# Altium PCB Drum_Toy.PcbDoc
Units mil, origin at the board's own origin, x right, y up, seen from the top; angles counter-clockwise.
Board outline 6000 x 4000 mil, 2 copper layers (Top Layer, Bottom Layer); 32 components, 21 nets, 91 pads, 3 vias.
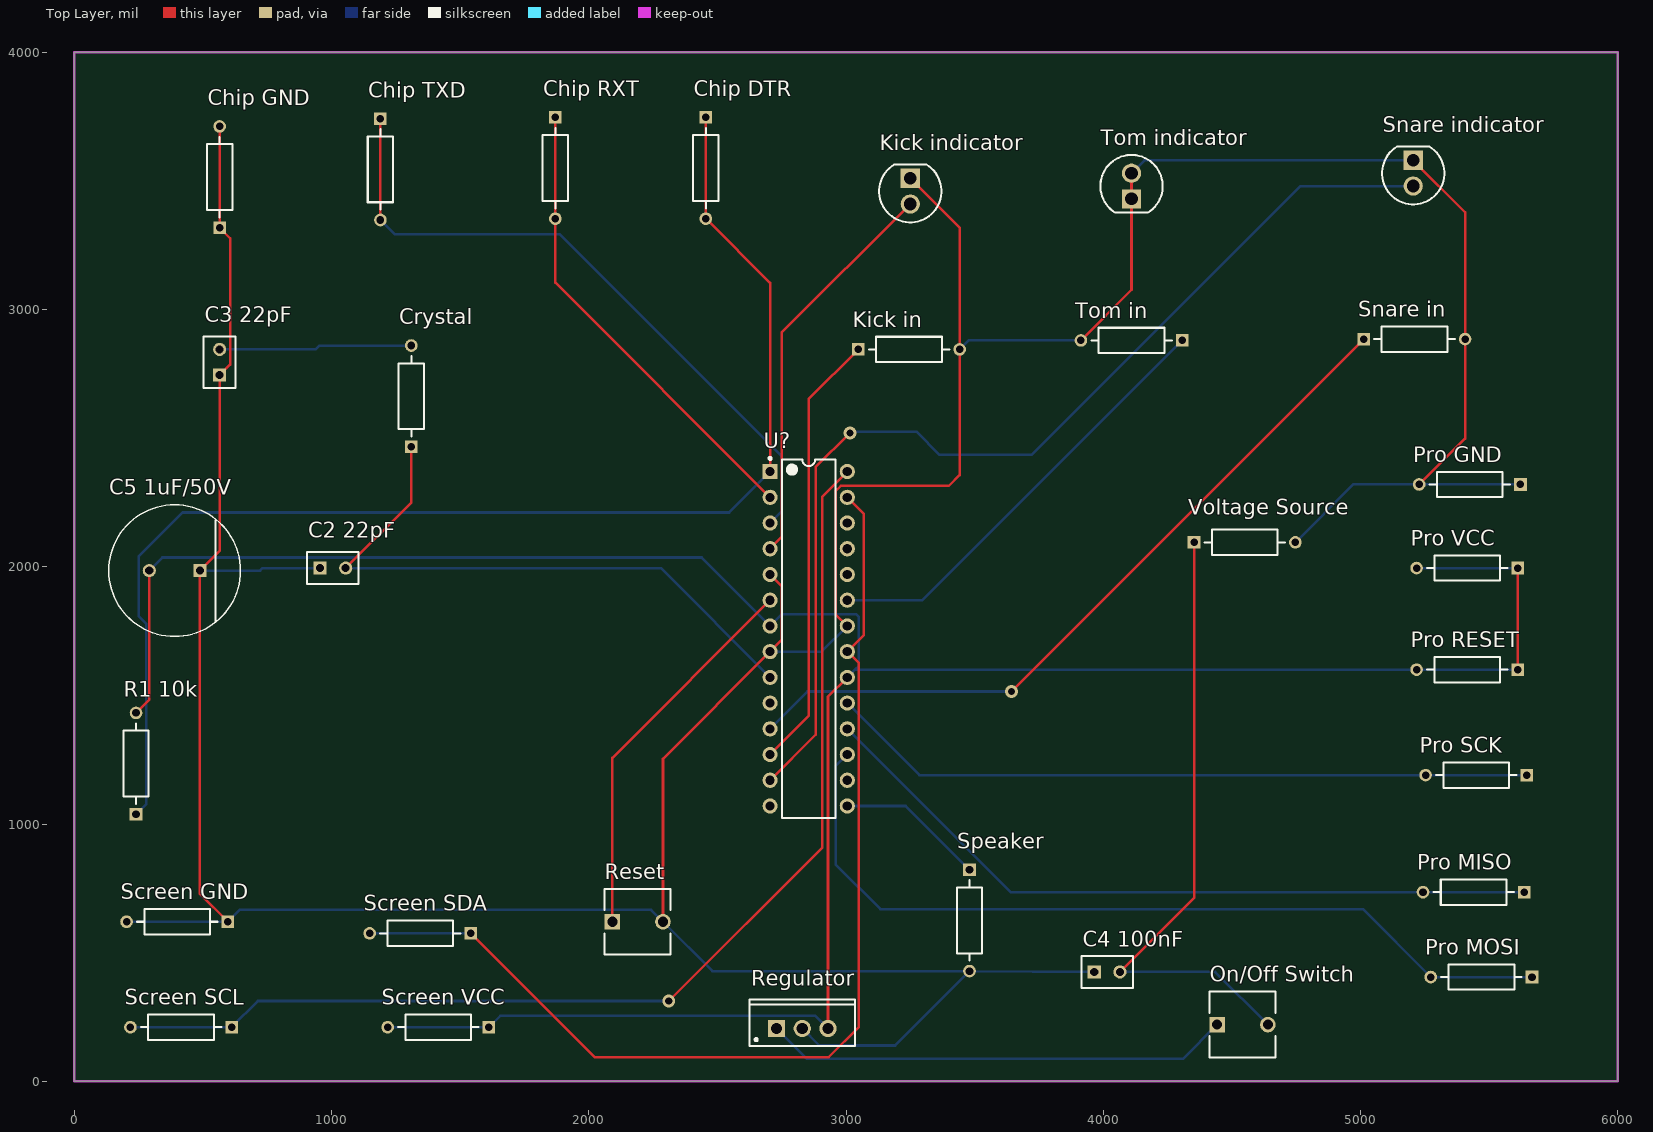
[diagram p0: Top Layer view]
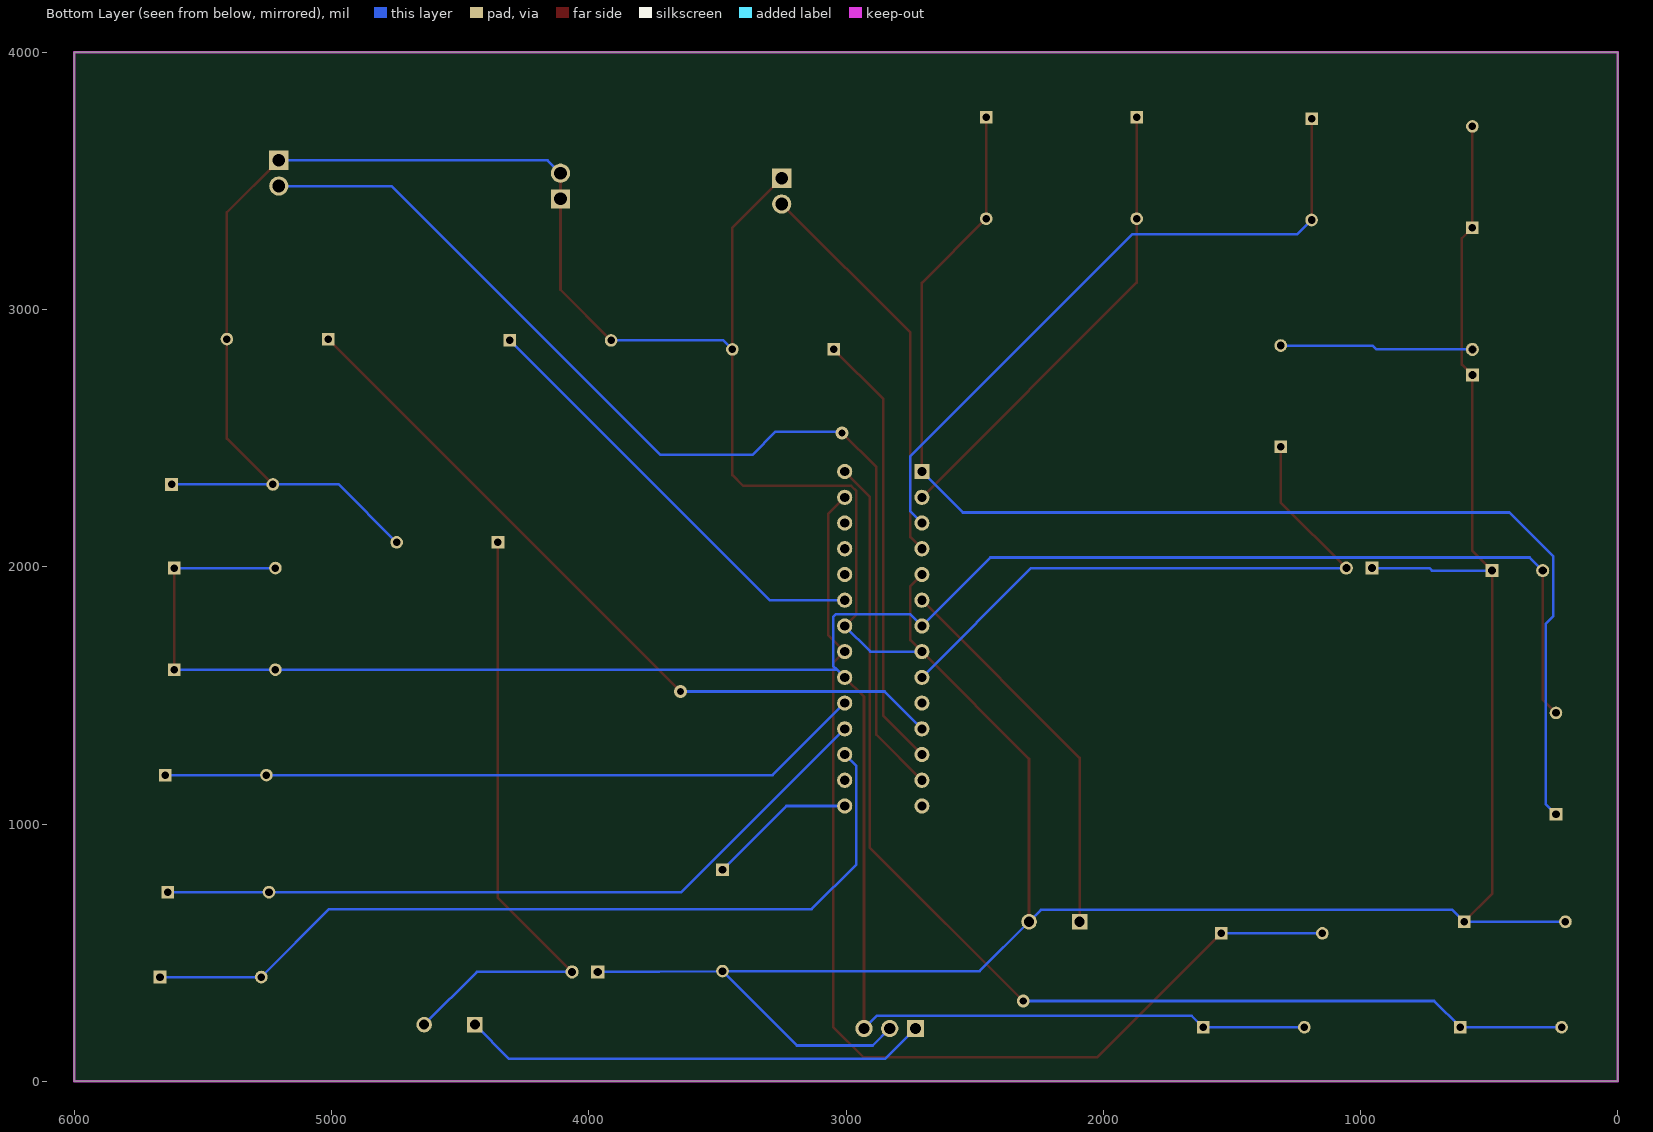
[diagram p1: Bottom Layer view, seen from below]
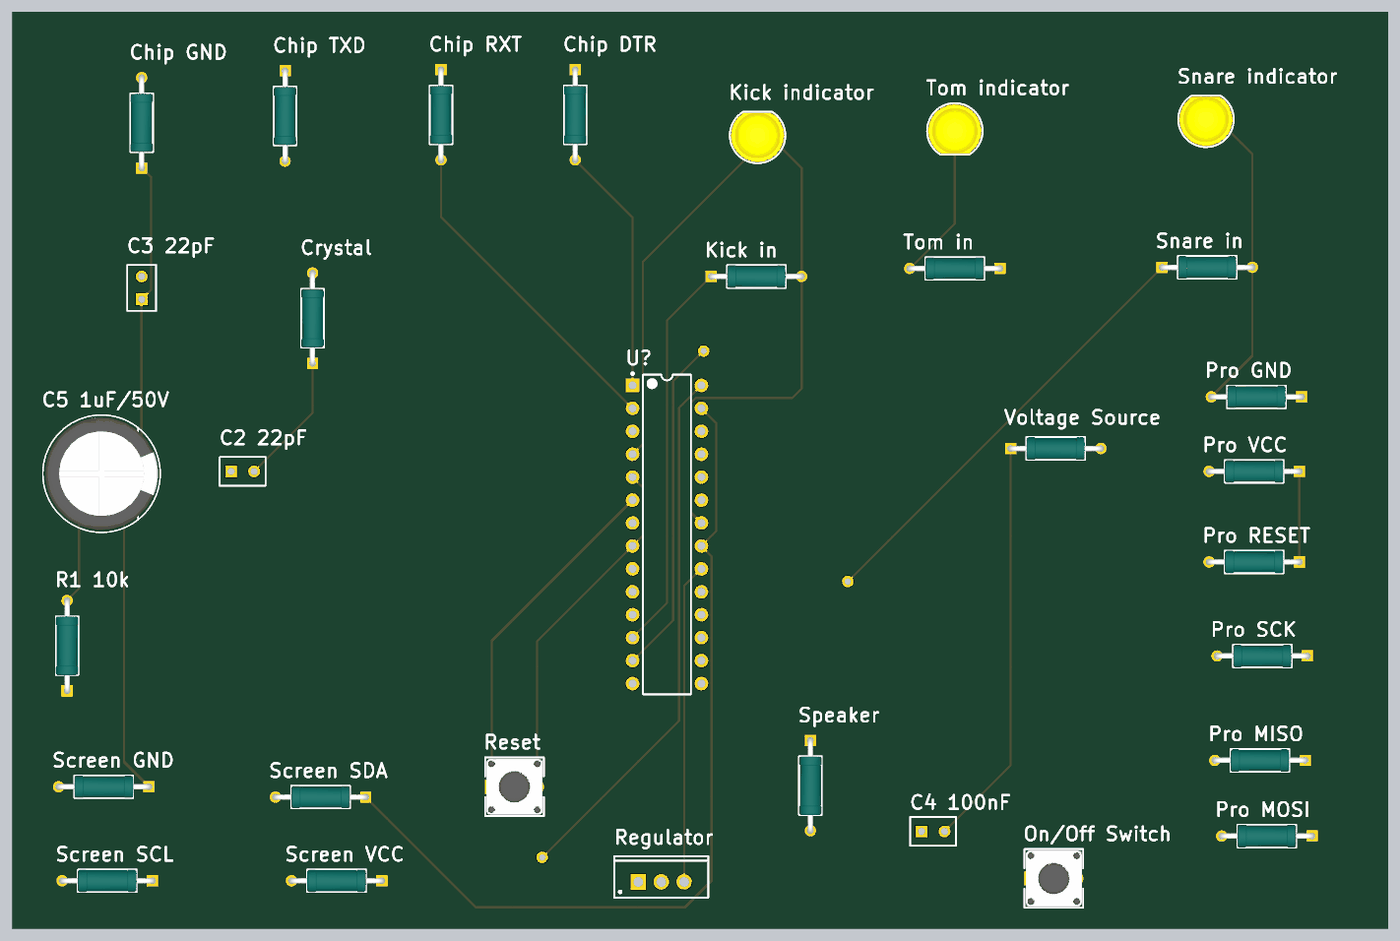
[diagram p2: 3D render of the assembled board from above, using the file's embedded part models]

## Layer stack, top to bottom
Top Solder: solder mask 0.4, Solder Resist, Dk 3.5
Top Layer: signal copper 1.4
Dielectric 1: dielectric 12.6, FR-4, Dk 4.8
Bottom Layer: signal copper 1.4
Bottom Solder: solder mask 0.4, Solder Resist, Dk 3.5

## Board outline
0,0 6000,0 6000,4000 0,4000

## Design rules (kind name [scope] priority, off if disabled: settings)
Clearance [All] p1: gap=10 ignorepadtopadclearanceinfootprint=FALSE except(0: Arc-Hole Track-Hole SMDPad-Hole THPad-Hole Via-Hole Fill-Hole Poly-Hole Region-Hole Text-Hole)
PolygonConnect [All] p1: connectstyle=Relief reliefconductorwidth=10 reliefentries=4 polygonreliefangle="90 Angle" airgapwidth=10
RoutingVias [All] p1: holewidth=28 width=50 viastyle="Through Hole" minholewidth=28 minwidth=50 maxholewidth=28 maxwidth=50
SolderMaskExpansion [All] p1: expansion=4 istentingtop=FALSE
Width [All] p1: maxlimit=10 minlimit=10 preferedwidth=10
30 further rules are at their usual default settings.

## Components (designator, comment, footprint, x,y, rotation, side; value= is the part's Value field where it differs from the comment)
"C2 22pF" "C320C104K5R5TA" CAPR51-254-508X318X736 1005,1995 r0 top
"C3 22pF" "C320C104K5R5TA" CAPR51-254-508X318X736 565,2795 r90 top
"C4 100nF" "C320C104K5R5TA" CAPR51-254-508X318X736 4015,425 r0 top
"C5 1uF/50V" "ECA1CHG332" FP-RAD-TH-D_12_5_0_5-L_25-MFG 390,1985 r180 top
"Chip DTR" "MRS25000C1000FRP00" FP-MRS25-MFG 2455,3550 r270 top
"Chip GND" "MRS25000C1000FRP00" FP-MRS25-MFG 565,3515 r90 top
"Chip RXT" "MRS25000C1000FRP00" FP-MRS25-MFG 1870,3550 r270 top
"Chip TXD" "MRS25000C1000FRP00" FP-MRS25-MFG 1190,3545 r270 top
Crystal "MRS25000C1000FRP00" FP-MRS25-MFG 1310,2663.15 r90 top
"Kick in" "MRS25000C1000FRP00" FP-MRS25-MFG 3245,2845 r0 top
"Kick indicator" "SSL-LX5093YD" FP-SSL-LX5093YD-MFG 3250,3460 r270 top
"On/Off Switch" "FSM4JRT" FP-FSM4JRT-MFG 4541.5,220 r0 top
"Pro GND" "MRS25000C1000FRP00" FP-MRS25-MFG 5425,2320 r180 top
"Pro MISO" "MRS25000C1000FRP00" FP-MRS25-MFG 5440,735 r180 top
"Pro MOSI" "MRS25000C1000FRP00" FP-MRS25-MFG 5470,405 r180 top
"Pro RESET" "MRS25000C1000FRP00" FP-MRS25-MFG 5415,1600 r180 top
"Pro SCK" "MRS25000C1000FRP00" FP-MRS25-MFG 5450,1190 r180 top
"Pro VCC" "MRS25000C1000FRP00" FP-MRS25-MFG 5415,1995 r180 top
"R1 10k" "MRS25000C1000FRP00" FP-MRS25-MFG 240,1235 r90 top
Regulator "L7805CV" TO220 2830,205 r0 top
Reset "FSM4JRT" FP-FSM4JRT-MFG 2190,620 r0 top
"Screen GND" "MRS25000C1000FRP00" FP-MRS25-MFG 400,620 r180 top
"Screen SCL" "MRS25000C1000FRP00" FP-MRS25-MFG 415,210 r180 top
"Screen SDA" "MRS25000C1000FRP00" FP-MRS25-MFG 1345,575 r180 top
"Screen VCC" "MRS25000C1000FRP00" FP-MRS25-MFG 1415,210 r180 top
"Snare in" "MRS25000C1000FRP00" FP-MRS25-MFG 5210,2885 r0 top
"Snare indicator" "SSL-LX5093YD" FP-SSL-LX5093YD-MFG 5205,3530 r270 top
Speaker "MRS25000C1000FRP00" FP-MRS25-MFG 3480,625 r270 top
"Tom in" "MRS25000C1000FRP00" FP-MRS25-MFG 4110,2880 r180 top
"Tom indicator" "SSL-LX5093YD" FP-SSL-LX5093YD-MFG 4110,3480 r90 top
U? "ATmega328-PU" 28P3 2855,1720 r0 top
"Voltage Source" "MRS25000C1000FRP00" FP-MRS25-MFG 4550,2095 r0 top

## Footprints (in the part's own frame and the unit in brackets; to place one, negate y for a bottom-side part, rotate by r counter-clockwise, add the part's x,y. Pads: shape width x height; smd on the part's side, far side on the other; paste and mask are expansions set on the pad)
28P3 [mm] "28-Pin Plastic Dual In-Line Package (PDIP)"
  rect 1.5x1.5 hole 0.9: 1(-3.81,16.51)
  round 1.5 hole 0.9: 2(-3.81,13.97) 3(-3.81,11.43) 4(-3.81,8.89) 5(-3.81,6.35) 6(-3.81,3.81) 7(-3.81,1.27) 8(-3.81,-1.27) 9(-3.81,-3.81) 10(-3.81,-6.35) 11(-3.81,-8.89) 12(-3.81,-11.43) 13(-3.81,-13.97) 14(-3.81,-16.51) 15(3.81,-16.51) 16(3.81,-13.97) 17(3.81,-11.43) 18(3.81,-8.89) 19(3.81,-6.35) 20(3.81,-3.81) 21(3.81,-1.27) 22(3.81,1.27) 23(3.81,3.81) 24(3.81,6.35) 25(3.81,8.89) 26(3.81,11.43) 27(3.81,13.97) 28(3.81,16.51)
  silkscreen extent -3.93,-17.7 2.65,17.93, body extent -3.6,-17.65 3.6,17.65, height 4.58
CAPR51-254-508X318X736 [mm] "THD, 2-Leads, Body 5.08x3.18mm"
  rect 1.3x1.3 hole 0.8: 1(-1.27,0)
  round 1.3 hole 0.8: 2(1.27,0)
  silkscreen extent -2.54,-1.59 2.54,1.59, body extent -2.54,-1.59 2.54,1.59, height 7.36
FP-FSM4JRT-MFG [mil]
  rect 60.65x60.65 hole 39 paste-99999 mask+0: 1(-98.5,0)
  round 60.65 hole 39 paste-99999 mask+0: 2(98.5,0)
  silkscreen extent -128,-128 128,128, body extent -133,-132 133,132, height 10
FP-MRS25-MFG [mm]
  rect 1.25x1.25 hole 0.75 paste-2539.97 mask+0: 1(-5,0)
  round 1.25 hole 0.75 paste-2539.97 mask+0: 2(5,0)
  silkscreen extent -3.97,-1.25 3.97,1.25, body extent -5.72,-1.35 5.72,1.35, height 0.25
FP-RAD-TH-D_12_5_0_5-L_25-MFG [mm]
  rect 1.3x1.3 hole 0.8 paste-2539.97 mask+0: 1(-2.5,0)
  round 1.3 hole 0.8 paste-2539.97 mask+0: 2(2.5,0)
  silkscreen extent -6.5,-6.5 6.5,6.5, body extent -6.6,-6.6 6.6,6.6, height 0.25
FP-SSL-LX5093YD-MFG [mm]
  rect 1.9x1.9 hole 1.25 paste-2539.97 mask+0: 1(-1.27,0)
  round 1.9 hole 1.25 paste-2539.97 mask+0: 2(1.27,0)
  silkscreen extent -2.62,-3.07 3.07,3.07, body extent -3.17,-3.17 3.17,3.17, height 0.25
TO220 [mm] "TO, Thru-Hole, Vertical, Heatsink Mounted; 3 In-Line Leads; Pitch 2.54 mm"
  rect 1.7x1.7 hole 1.1: 1(-2.54,0)
  round 1.7 hole 1.1: 2(0,0) 3(2.54,0)
  silkscreen extent -5.2,-1.75 5.2,2.85, body extent -5.25,-1.8 5.25,2.9, height 19.7

## Part data
"C2 22pF" "C3 22pF" "C4 100nF": library part CMP-1664-00004-1, "Radial Leaded Multilayer Ceramic Capacitor, 0.1 uF, +/- 10%, 50 V, -55 to 125 degC, 2-Pin THD, RoHS, Tape and Reel", Case\Package=SOT-23-5, Dropout Voltage="260 mV", Max Input Voltage="8 V", Max Operating Temperature="85 degC", Max Power Dissipation="250 mW", Min Operating Temperature="-40 degC", Output Current="150 mA", Output Voltage="5 V", Package Quantity=3000, ComponentLink1Description="Manufacturer URL", ComponentLink1URL=http://www.kemet.com/, ComponentLink2Description=Datasheet, ComponentLink2URL=http://www.kemet.com/docfinder?Partnumber=C320C104K5R5TA, DatasheetVersion=Dec-15, Height="1.3 mm", Length="3 mm", Mount="Surface Mount", Outputs=1, PackageDescription="2-Pin Through Hole Device, Body 5.08 x 3.18 mm, Pitch 2.54 mm", PackageReference=CAPR51-254-508X318X736, Packaging="Tape and Reel", Pins=5, Radiation Hardening=No, RoHSCompliant=true, Width="1.8 mm"
"C5 1uF/50V": library part CMP-05427-000118-1, "Aluminum Electrolytic Capacitors (Radial Lead Type) AEC-Q200 Qualified 3300uF ±20% 16V", Capacitance=3.3mF, Case/Package=Radial, Dielectric Material=Aluminium, Leakage Current=3uA, Max Operating Temperature=105°C, Min Operating Temperature=-55°C, Package Quantity=200, Ripple Current=1.17A, Tolerance=20%, Voltage=16V, Construction=RADIAL, Contact Plating=Tin, Diameter=12.5mm, Dissipation Factor=0.24%, Height=25mm, Height - Seated (Max)=1.063inch, Lead Diameter=0.6mm, Lead Free="Lead Free", Lead Pitch=5mm, Lead/Base Style=Straight, Length=25mm, Life (Hours)=2000Hour, Mount="Through Hole", Number of Pins=2, Packaging=Bulk, Radiation Hardening=No, REACH SVHC="No SVHC", RoHS Compliant=Yes, Series=NHG, Termination=Radial, Voltage Rating=16V, Voltage Rating (DC)=16V
"Chip DTR" "Chip GND" "Chip RXT" "Chip TXD" Crystal "Kick in" "Pro GND" "Pro MISO" "Pro MOSI" "Pro RESET" "Pro SCK" "Pro VCC" "R1 10k" "Screen GND" "Screen SCL" "Screen SDA" "Screen VCC" "Snare in" Speaker "Tom in" "Voltage Source": library part CMP-00030-42757237-1, "MRS25000C1000FRP00 Resistor, 100 Ohm, ± 1%, 600 mW, Axial Leaded, Metal Film (Thin Film), Professional", Case/Package=Axial, Max Operating Temperature=155°C, Max Power Dissipation=600mW, Min Operating Temperature=-55°C, Resistance=100Ω, Temperature Coefficient=50ppm/°C, Tolerance=1%, Voltage Rating=350V, Composition="Metal Film, Thin Film", Contact Plating=Tin, Diameter=2.5mm, Lead Diameter=600µm, Lead Free="Lead Free", Length=6.5mm, Military Standard=Not, Mount="Through Hole", NexarPartId=42757237, Number of Pins=2, Number of Terminations=2, Packaging="Tape & Reel (TR)", Power Rating=600mW, Radiation Hardening=No, REACH SVHC=Unknown, RoHS=Compliant, Schedule B="8533210090, 8533210090", Termination=Axial, Voltage Rating (DC)=350V, Width=2.5mm
"Kick indicator" "Snare indicator" "Tom indicator": library part CMP-57192-000007-1, "LED YELLOW DIFFUSED T-1 3/4 T/H", Case/Package=Radial, Color=Yellow, Forward Current=20mA, Forward Voltage=2.1V, Max Operating Temperature=85°C, Min Operating Temperature=-40°C, Package Quantity=1000, Diameter=5mm, Dominant Wavelength=568nm, Height=8.6mm, Illumination Color=Yellow, Lead Free="Lead Free", Length=0.5inch, Lens Color=Yellow, Lens Style=Dome, Lens Transparency=Diffused, Luminous Intensity=30mcd, Mount="Through Hole", Number of LEDs=1, Number of Pins=2, Packaging=Bulk, REACH SVHC="No SVHC", RoHS Compliant=Yes, Series=-, Test Current=20mA, Viewing Angle=60°, Wavelength=585nm, Weight=0.01lb, Width=1.5inch
"On/Off Switch" Reset: library part CMP-03407-000038-1, "SWITCH TACTILE SPST-NO 0.05A 24V", Case/Package=Radial, Contact Current Rating=50mA, Contact Resistance=100mR, Max Operating Temperature=105°C, Max Voltage Rating (DC)=12V, Min Operating Temperature=-35°C, Operating Force=1.57N, Package Quantity=10000, Actuator Diameter=3.5mm, Actuator Length=0.055inch, Actuator Material=Resin, Actuator Type=Standard, Contact Material="Copper Alloy", Contact Plating=Silver, Current Rating=50mA, Depth=6.19mm, Electrical Life=100000Cycles, Illumination Type=Non-Illuminated, Length=6.19mm, Max Current Rating=50mA, Mechanical Life=100000Cycles, Mount="Through Hole", Orientation=Straight, Packaging="Tape and Reel", Radiation Hardening=No, RoHS Compliant=Yes, Series=FSMJRT, Switch Function=Off-Mom, Switch Travel=0.25mm, Termination="PC Pins", Throw Configuration=SPST, Type=Switch, Voltage Rating (DC)=12V
Regulator: library part CMP-0244-00483-1, "Positive Voltage Regulator, 5V, 3-Pin TO-220", ComponentLink1Description="Manufacturer URL", ComponentLink1URL=http://www.st.com, ComponentLink2Description=Datasheet, ComponentLink2URL=http://www.st.com/internet/com/TECHNICAL_RESOURCES/TECHNICAL_LITERATURE/DATASHEET/CD00000444.pdf, ComponentLink3Description="Package Specification", ComponentLink3URL=http://www.st.com/internet/com/TECHNICAL_RESOURCES/TECHNICAL_LITERATURE/PACKAGE_INFORMATION/CD00004649.pdf, DatasheetVersion=16/11/2011, PackageDescription="TO, Thru-Hole, Vertical, Heatsink Mounted; 3 In-Line Leads; Pitch 2.54 mm", PackageReference=TO220, PackageVersion=ver3.0
U?: library part CMP-0095-00015-2, "8-bit AVR Microcontroller, 32KB Flash, 1KB EEPROM, 2KB SRAM, 28-pin PDIP, Industrial Grade (-40°C to 85°C)", ComponentLink1Description="Manufacturer URL", ComponentLink1URL=http://www.atmel.com/, ComponentLink2Description="ATmega48A/48PA/88A/88PA/168A/168PA/328/328P Datasheet", ComponentLink2URL=http://www.atmel.com/dyn/resources/prod_documents/8271.pdf, ComponentLink3Description="ATmega48A/48PA/88A/88PA/168A/168PA/328/328P Summary", ComponentLink3URL=http://www.atmel.com/dyn/resources/prod_documents/8271S.pdf, DatasheetVersion="revD, May-2011", PackageDescription="28-lead (0.300\"/7.62mm Wide) Plastic Dual Inline Package (PDIP)", PackageReference=28P3, PackageVersion="revB, Sep-2001", RevisionNote="DatasheetVersion updated. URLs added."

## Via types
v1: diameter 50, hole 28, Top Layer to Bottom Layer, 3 vias

## Nets (pads, with @x,y where several pads share a name; then routed paths per layer and width w, separated by ;. In a path a pad name is that pad's centre, name@x,y a point inside that pad or via, vN(x,y) a via of type N, cw(c..) or ccw(c..) an arc to the next point about the centre after c; other vN are vias at no path point)
"NetC2 22pF_1": "C2 22pF.1" "C3 22pF.1" "C4 100nF.1" "C5 1uF/50V.1" "Chip GND.1" "Chip GND.2" "Kick in.2" "Kick indicator.1" "Pro GND.1" "Pro GND.2" "Screen GND.1" "Screen GND.2" "Snare in.2" "Snare indicator.1" "Tom in.2" "Tom indicator.1" "Tom indicator.2" "Voltage Source.2" Regulator.2 Reset.2 Speaker.2 U?.5 U?.8 U?.22 | length 17253.5
  Top Layer w10: 565,3711.85 565,3318.15 606,3277.15 606,2786 565,2745 565,2061.57 488.43,1985 488.43,728.42 596.85,620 ; Reset.2 2288.5,1253.5 U?.8 2750,1715 2750,1925 U?.5 ; U?.22 2960,1815 2960,2295 2980,2315 3400,2315 3441.85,2356.85 3441.85,2845 3441.85,3318.15 3250,3510 ; 3913.15,2880 4110,3076.85 4110,3430 4110,3530 ; 5205,3580 5406.85,3378.15 5406.85,2885 5406.85,2498.7 5228.15,2320
  Bottom Layer w10: 203.15,620 596.85,620 642.85,666 2242.5,666 Reset.2 2480.35,428.15 Speaker.2 ; 488.43,1985 722,1985 732,1995 955,1995 ; U?.8 2905,1670 U?.22 ; Regulator.2 2896,139 3190.85,139 Speaker.2 ; 3441.85,2845 3476.85,2880 3913.15,2880 ; 3965,425 3726.15,425 Speaker.2 ; 4110,3530 4160,3580 5205,3580 ; 4746.85,2095 4971.85,2320 5228.15,2320 5621.85,2320
"NetC2 22pF_2": "C2 22pF.2" Crystal.1 U?.9 | length 2403
  Top Layer w10: 1055,1995 1310,2250 Crystal.1
  Bottom Layer w10: 1055,1995 2280,1995 U?.9
"NetC3 22pF_2": "C3 22pF.2" Crystal.2 | length 751.2
  Bottom Layer w10: 565,2845 938,2845 953,2860 Crystal.2
"NetC4 100nF_2": "C4 100nF.2" "On/Off Switch.2" "Voltage Source.1" | length 2449.3
  Top Layer w10: 4065,425 4353.15,713.15 4353.15,2095
  Bottom Layer w10: 4065,425 4435,425 4640,220
"NetC5 1uF/50V_2": "C5 1uF/50V.2" "Pro RESET.1" "Pro RESET.2" "Pro VCC.1" "Pro VCC.2" "R1 10k.2" "Screen VCC.1" "Screen VCC.2" Regulator.3 U?.7 U?.20 | length 10252.7
  Top Layer w10: 240,1431.85 291.57,1483.42 291.57,1985 ; Regulator.3 2930,1495 U?.20 ; 5611.85,1600 5611.85,1995
  Bottom Layer w10: 291.57,1985 342.57,2036 2439,2036 U?.7 2750,1815 3040,1815 3050,1805 3050,1615 3035,1600 ; 1218.15,210 1611.85,210 1655.85,254 2881,254 Regulator.3 ; U?.20 3035,1600 ; 5218.15,1995 5611.85,1995 ; 5611.85,1600 5218.15,1600 3035,1600
"NetChip DTR_1": "Chip DTR.1" "Chip DTR.2" "R1 10k.1" U?.1 | length 5102.9
  Top Layer w10: 2455,3746.85 2455,3353.15 2705,3103.15 U?.1
  Bottom Layer w10: 240,1038.15 280,1078.15 280,1778 250,1808 250,2040 421,2211 2546,2211 U?.1
"NetChip RXT_1": "Chip RXT.1" "Chip RXT.2" U?.2 | length 1822.7
  Top Layer w10: 1870,3746.85 1870,3353.15 1870,3105 U?.2
"NetChip TXD_1": "Chip TXD.1" "Chip TXD.2" U?.3 | length 2612.6
  Top Layer w10: 1190,3348.15 1190,3741.85
  Bottom Layer w10: 1190,3348.15 1245.15,3293 1887,3293 2750,2430 2750,2215 U?.3
"NetKick in_1": "Kick in.1" U?.12 | length 1717.1
  Top Layer w10: U?.12 2855,1420 2855,2651.85 3048.15,2845
"NetKick indicator_2": "Kick indicator.2" U?.4 | length 1565.7
  Top Layer w10: U?.4 2750,2115 2750,2910 3250,3410
"NetOn/Off Switch_1": "On/Off Switch.1" Regulator.1 | length 1817
  Bottom Layer w10: Regulator.1 2848,87 4310,87 4443,220
"NetPro MISO_1": "Pro MISO.1" "Pro MISO.2" U?.18 | length 2894.9
  Bottom Layer w10: U?.18 3640,735 5243.15,735 5636.85,735
"NetPro MOSI_1": "Pro MOSI.1" "Pro MOSI.2" U?.17 | length 3333.9
  Bottom Layer w10: U?.17 2960,1225 2960,843 3134,669 5009.15,669 5273.15,405 5666.85,405
"NetPro SCK_1": "Pro SCK.1" "Pro SCK.2" U?.19 | length 2757.8
  Bottom Layer w10: U?.19 3285,1190 5253.15,1190 5646.85,1190
NetReset_1: Reset.1 U?.6 | length 1504.1
  Top Layer w10: Reset.1 2091.5,1256.5 U?.6
"NetScreen SCL_1": "Screen SCL.1" "Screen SCL.2" U?.28 | length 4480.6
  Top Layer w10: v1(2311,312) 2908,909 2908,2273 U?.28
  Bottom Layer w10: 218.15,210 611.85,210 713.85,312 v1(2311,312)
"NetScreen SDA_1": "Screen SDA.1" "Screen SDA.2" U?.21 U?.27 | length 4280.6
  Top Layer w10: 1541.85,575 2022.85,94 2933,94 3050,211 3050,1625 U?.21 3069.53,1734.53 3069.53,2205.47 U?.27
  Bottom Layer w10: 1148.15,575 1541.85,575
"NetSnare in_1": "Snare in.1" U?.11 | length 2935.7
  Top Layer w10: v1(3643.15,1515) 5013.15,2885
  Bottom Layer w10: U?.11 2850,1515 v1(3643.15,1515)
"NetSnare indicator_2": "Snare indicator.2" U?.13 | length 4140.6
  Top Layer w10: U?.13 2882,1347 2882,2387 v1(3015,2520)
  Bottom Layer w10: v1(3015,2520) 3020,2525 3273.91,2525 3363.91,2435 3722,2435 4767,3480 5205,3480
NetSpeaker_1: Speaker.1 U?.15 | length 577.8
  Bottom Layer w10: U?.15 3231.85,1070 Speaker.1
"NetTom in_1": "Tom in.1" U?.23 | length 1720.2
  Bottom Layer w10: U?.23 3296.85,1870 4306.85,2880
pads on no net: U?.10 U?.14 U?.16 U?.24 U?.25 U?.26

## Keep-outs
Keep-Out Layer:
  the board outline again, w10